# Altium PCB Controller.PcbDoc (part 3 of 3)
Units mm, origin at the board's own origin, x right, y up, seen from the top; angles counter-clockwise.
Board outline 100 x 95 mm, 2 copper layers (Top Layer, Bottom Layer); 164 components, 143 nets, 702 pads, 2108 vias.
Unrouted connection lines stored in the file: 116.
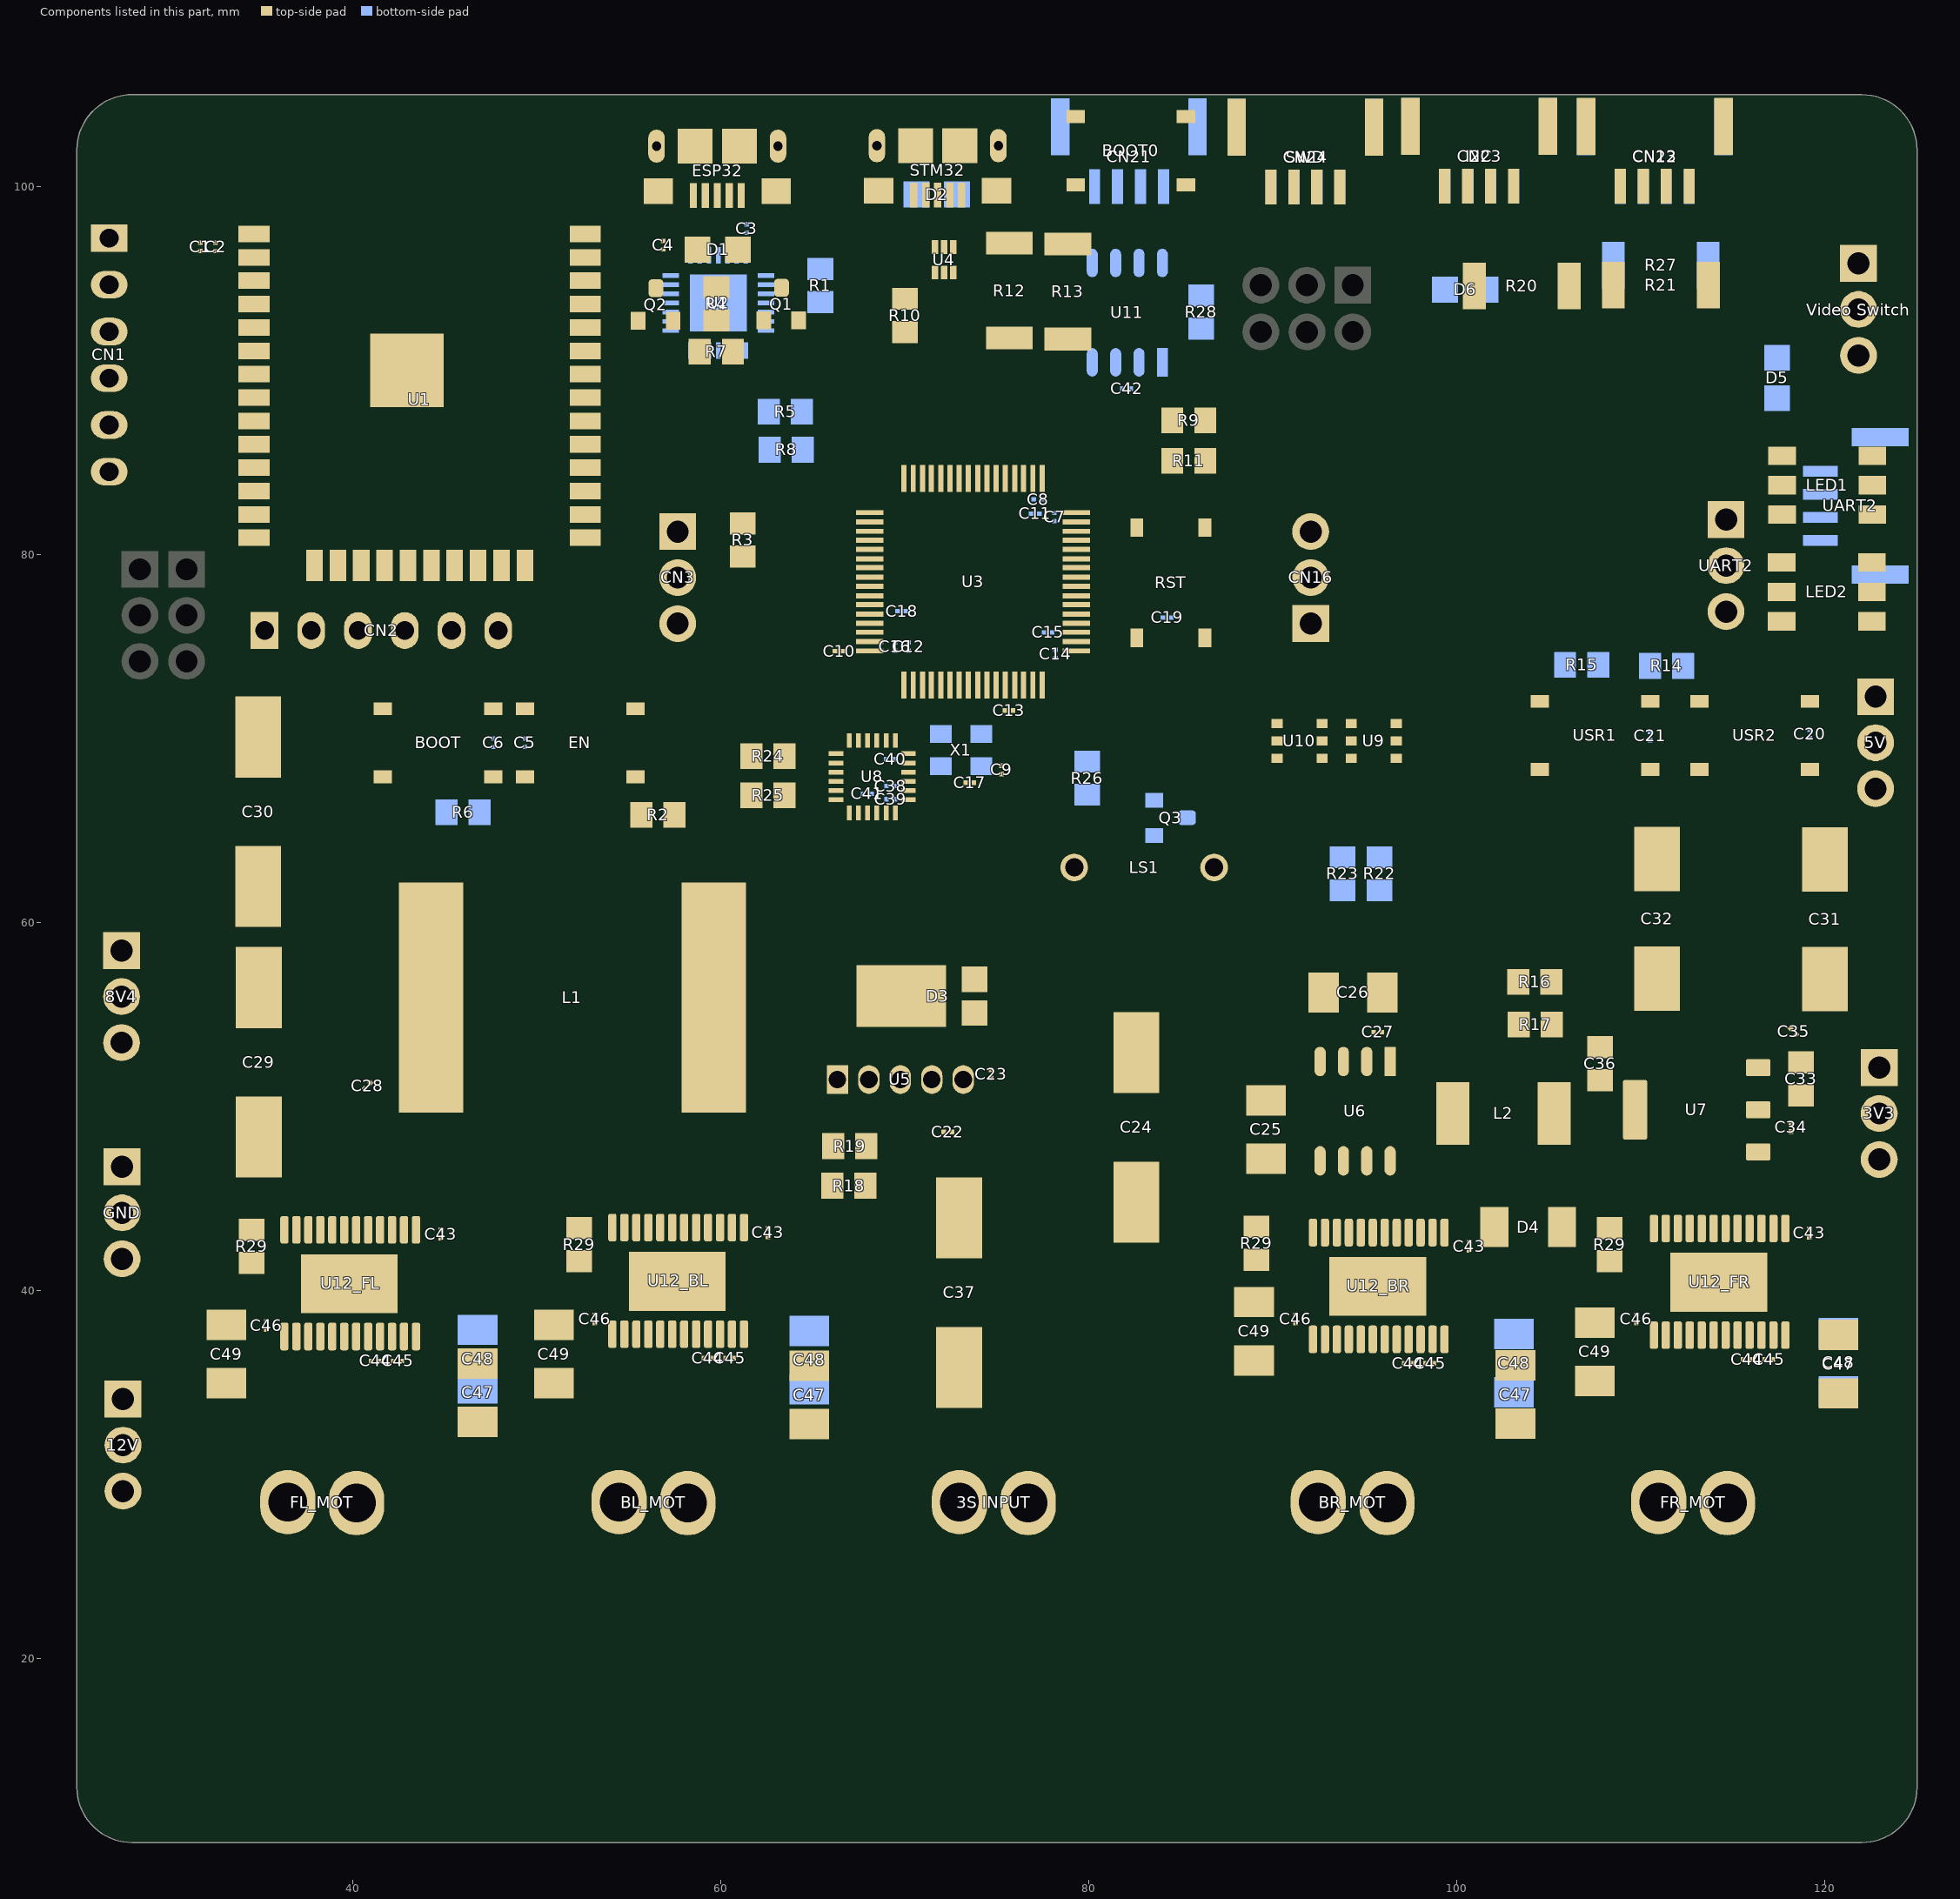
[diagram p3: the components of this part, seen from the top]

## Other copper
Top Layer:
  pour cut-out: 51,107
  pour cut-out: 34,105 34,98 53,98 53,105
  region net 5V: 105.75,53.8 106.55,53.8 106.55,49 105.75,49
  region net 5V: 109.625,55.45 112.1,55.45 112.75,54.8 108.975,54.8
  region net 8V4: 26.15,59.75 26.15,52.2 28.7,52.2 28.7,59.75
  region net 8V4: 26.15,57.2 26.15,54.7 37.525,54.7 42.525,49.7 46,49.7 46,62.175 42.5,62.175 37.525,57.2
  region net NetD3_3: 72.2,54.35 64.55,54.35 61.25,51.05 61.25,61.1 64.675,57.675 72.2,57.675
  region net NetCN26_K: 111.125,38.275 111.125,33.9 109.25,32.025 109.25,27.125 109.925,26.45 112.7,26.45 112.7,36.325 112.225,36.8 112.225,38.275
  region net NetCN26_A: 113.725,38.25 113.725,36.8 112.925,36 112.925,26.45 115.9,26.45 116.425,26.975 116.425,32.15 114.825,33.75 114.825,38.25
  region: 92.4,36.6
  region net NetCN28_K: 93.7,38.025 92.6,38.025 92.6,33.8 90.725,31.925 90.725,27.15 91.425,26.45 94.2,26.45 94.2,36.075 93.7,36.575
  region net NetCN28_A: 95.2,38.025 95.2,36.575 94.45,35.825 94.45,26.475 97.425,26.475 97.925,26.975 97.925,32.35 96.3,33.975 96.3,38.025
  region: 78.425,26.45
  region net NetC45_BL_1: 60.825,36.2 60.6,36.2 60.6,36.65 60.375,36.875 60.375,37.075 60.825,37.075
  region net NetCN27_K: 55.625,38.3 54.525,38.3 54.525,33.45 52.75,31.675 52.75,27.15 53.475,26.425 56.2,26.425 56.2,36.225 55.625,36.8
  region: 55.825,37.025
  region net NetCN27_A: 57.125,38.3 57.125,36.825 56.4,36.1 56.4,26.475 59.4,26.475 59.9,26.975 59.9,31.85 58.225,33.525 58.225,38.3
  region: 45.775,40.325
  region net NetC45_FL_1: 42.55,38.25 42.55,36.35 42.525,36.325 42.525,36.05 42.775,36.05 42.775,36.325 43,36.55 43,38.25
  region net NetC45_FL_2: 41.9,38.25 41.9,36.75 42.075,36.575 42.075,36.05 42.325,36.05 42.325,36.4 42.35,36.425 42.35,38.25
  region net NetC44_FL_1: 41.25,36.975 41.25,36.75 41.325,36.675 41.325,36.05 41.6,36.05 41.6,36.675 41.7,36.775 41.7,36.975
  region net NetCN25_K: 37.8,38.2 36.7,38.2 36.7,33.675 34.725,31.7 34.725,27.125 35.375,26.475 38.225,26.475 38.225,36.3 37.8,36.725
  region net NetCN25_A: 39.3,38.175 39.3,36.725 38.45,35.875 38.45,26.45 41.375,26.45 41.9,26.975 41.9,31.475 40.4,32.975 40.4,38.175
  region net GND: 36.2,34.875
Bottom Layer:
  pour cut-out: 34,105 34,98 53,98 53,105
  region net 12V: 119.65,33.825 119.65,33.325 121.8,33.325 121.8,33.825
  region: 76.675,38.825
  region: 76.65,41.65
  region: 63.725,35.475

## Silkscreen, mask and mechanical layers (free items; w line width, h text height)
Top Overlay:
  lines w0.178: 97,100 97,98.675 97.025,98.65 115.075,98.65 115.075,100.05
  lines w0.254: 29.561,72.797 32.361,72.797 32.361,80.597 29.561,80.597 ; 29.821,72.797 27.021,72.797 27.021,72.997 27.021,80.597 29.821,80.597 ; 87.94,93.245 87.94,96.045 88.14,96.045 95.74,96.045 95.74,93.245 ; 87.94,93.505 87.94,90.705 95.74,90.705 95.74,93.505
  text "I2C" at 104.45,97.125 h1.14
  text "CLK" at 87.875,96.425 h0.81
  text "DIO" at 90.775,96.4 h0.81
  text "SWO" at 93.35,96.4 h0.81
  text "S" at 123.65,95.25 h1.27
  text "+" at 123.6,92.65 h1.27
  text "-" at 123.6,90.2 h1.27
  text "nRST" at 90.2,89.525 h0.81
  text "GND" at 93.575,89.5 h0.81
  text "JLCJLCJLCJLC" at 36.4,85.25 h1.25
  text "Robot Controller R1 / Isaac Wong / May 2020" at 94.575,82.525 h1.14
  text "Servo" at 25.375,81.15 h1.52
  text "S" at 25.425,78.55 h1.52
  text "+" at 25.425,76 h1.52
  text "-" at 25.45,73.45 h1.52
Bottom Overlay:
  lines w0.178: 77.875,100.05 77.875,98.65 115.075,98.65 115.075,100.05
  text "CAN Bus" at 100.925,96.425 h1.52
Bottom Solder:
  rectangle: 35.95,38.4 43.725,42.375
  rectangle: 53.775,38.525 61.575,42.525
  rectangle: 91.85,38.25 99.65,42.25
  rectangle: 110.375,38.45 118.175,42.475
  region: 109.2,33.6
Mechanical 1:
  the board outline again, w0.1

## Text inside footprints (layer, text, board x,y; h text height)
U5: Top Overlay "1" at 66.965,49.418 h1.52 r90